# EAGLE board HM_SHT21b (EAGLE 9.5.0)
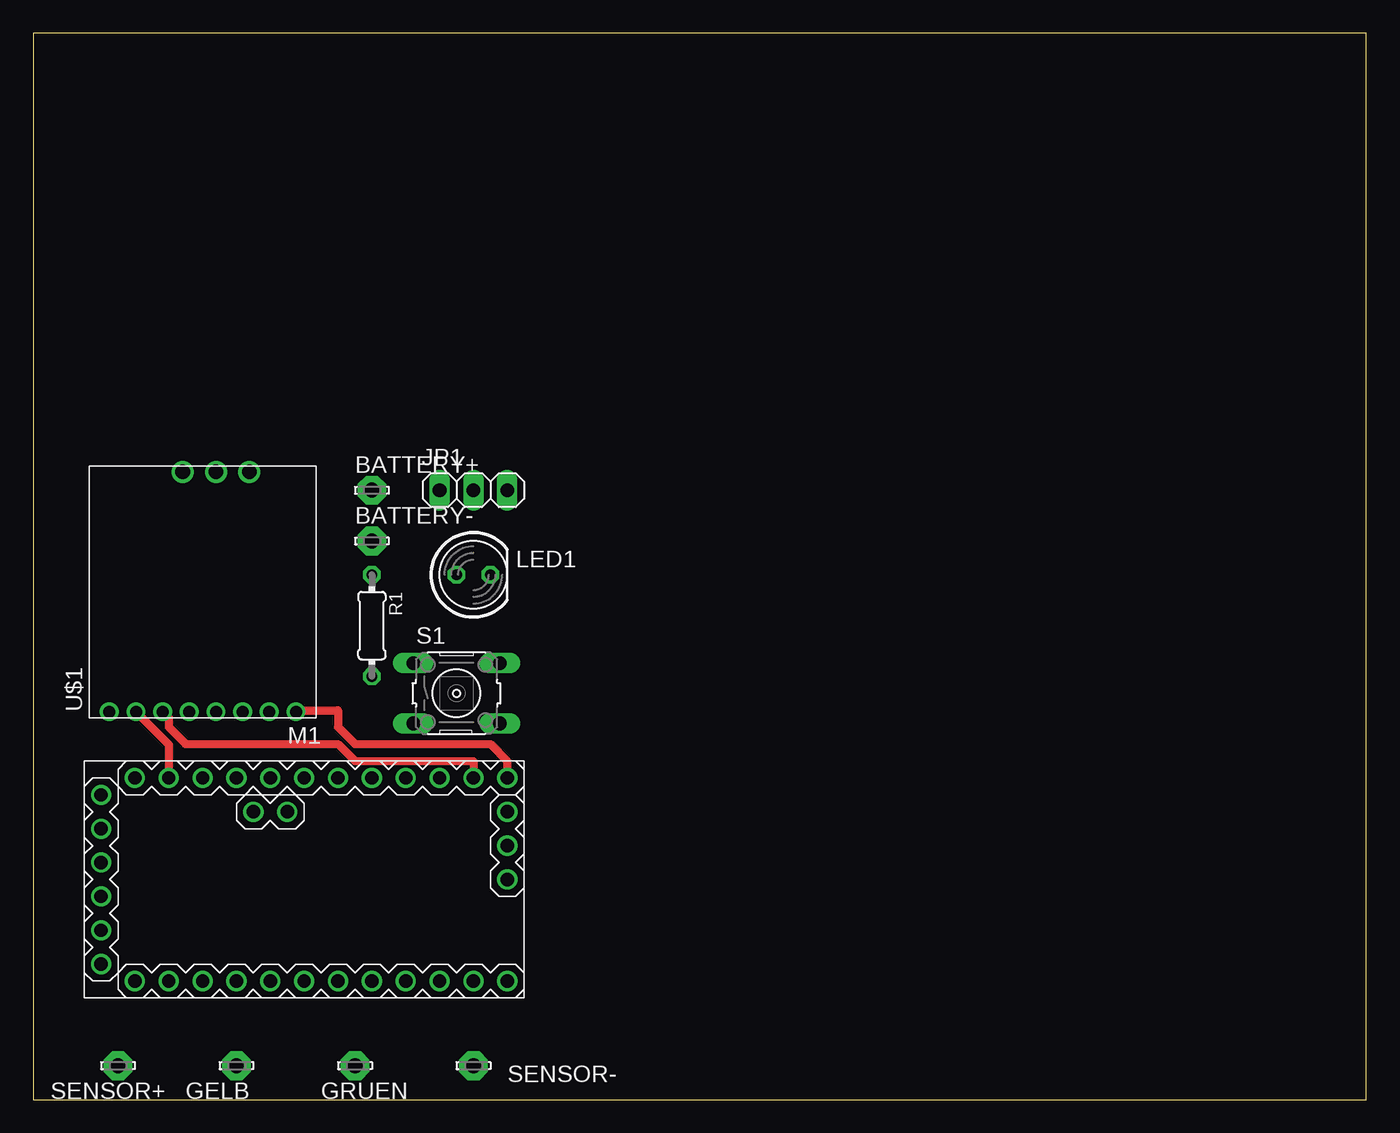
[diagram p0: board, top side]
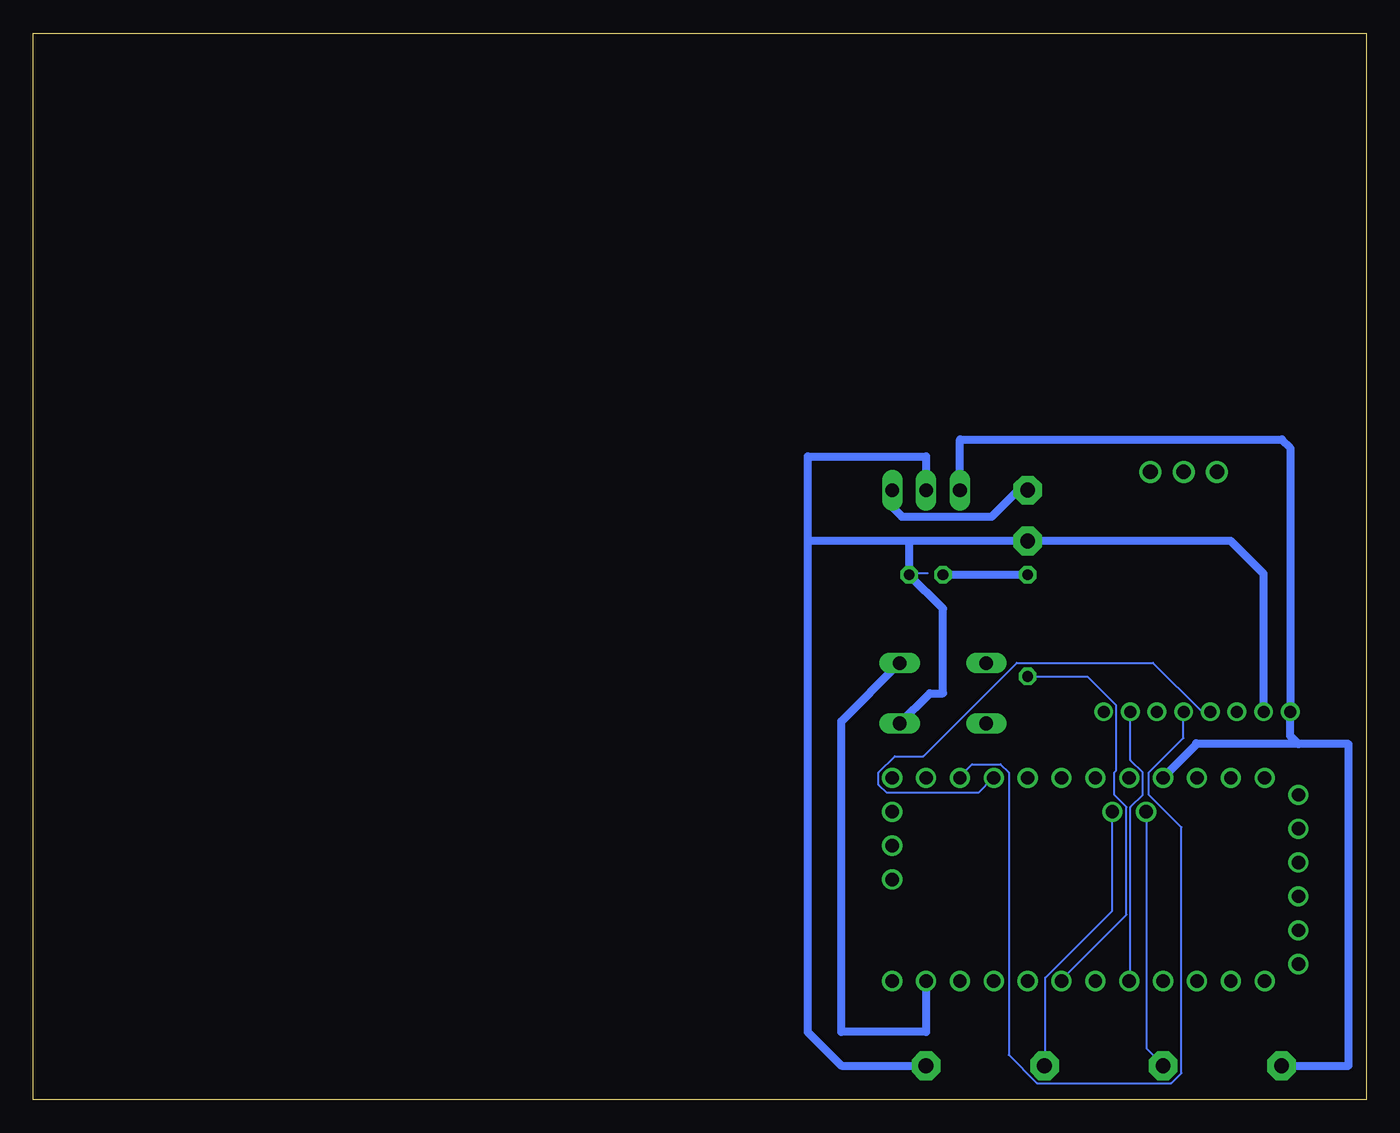
[diagram p1: board, bottom side, seen from below]

Size 100 x 80 mm. Coordinates in mm from the lower left corner, seen from the top.
Outline: 0,0 100,0 100,80 0,80 0,0
Copper layers (1*16): Top 0.035mm / dielectric 1.5mm / Bottom 0.035mm
Design rules "default": minimum track width 6mil, minimum drill 0.35mm, track to track 6mil, track to pad 6mil, pad to pad 6mil, via to via 6mil, smd to smd 6mil, copper to edge 40mil, drill to drill 6mil, minimum pad ring 10mil, minimum via ring 8mil, stop-mask expansion 4mil, vias tented up to drill 0mil, thermal gap 10mil

## Footprints (pad centres in the part's own frame; a part is rotated, then mirrored left to right if it is on the bottom)
LSP11 = drill 1.118 pad 2.159 octagon: MP 0,0
1X03 = drill 1.016 long: 1 -2.54,0; 2 0,0; 3 2.54,0
LED5MM = drill 0.813 octagon: A -1.27,0; K 1.27,0
ARDUINO-PRO-MINI = drill 1: J1.1 -15.24,6.35; J1.2 -15.24,3.81; J1.3 -15.24,1.27; J1.4 -15.24,-1.27; J1.5 -15.24,-3.81; J1.6 -15.24,-6.35; J2.1 -1.27,5.08; J2.2 -3.81,5.08; J3.1 15.24,0; J3.2 15.24,2.54; J3.3 15.24,5.08; J6.1 -12.7,7.62; J6.2 -10.16,7.62; J6.3 -7.62,7.62; J6.4 -5.08,7.62; J6.5 -2.54,7.62; J6.6 0,7.62; J6.7 2.54,7.62; J6.8 5.08,7.62; J6.9 7.62,7.62; J6.10 10.16,7.62; J6.11 12.7,7.62; J6.12 15.24,7.62; J7.1 15.24,-7.62; J7.2 12.7,-7.62; J7.3 10.16,-7.62; J7.4 7.62,-7.62; J7.5 5.08,-7.62; J7.6 2.54,-7.62; J7.7 0,-7.62; J7.8 -2.54,-7.62; J7.9 -5.08,-7.62; J7.10 -7.62,-7.62; J7.11 -10.16,-7.62; J7.12 -12.7,-7.62
0204/7 = drill 0.813 octagon: 1 -3.81,0; 2 3.81,0
B3F-10XX = drill 1.016 long: 1 -3.251,2.261; 2 3.251,2.261; 3 -3.251,-2.261; 4 3.251,-2.261
CC1101 = drill 1.1: ANT 9,-1; GND1 9,-3.5; GND2 9,1.5 | drill 0.9: CSN -9,-7; GDO0 -9,-5; GDO2 -9,-3; GND0 -9,5; SCLK -9,1; SI -9,3; SO -9,-1; VCC -9,7

## Placement (x,y rotation side)
BATTERY+  LSP11  [LSP11]  25.4,45.72 0 top
BATTERY-  LSP11  [LSP11]  25.4,41.91 0 top
GELB  LSP11  [LSP11]  15.24,2.54 0 top
GRUEN  LSP11  [LSP11]  24.13,2.54 0 top
JP1  [1X03]  33.02,45.72 0 top
LED1  red  [LED5MM]  33.02,39.37 0 top
M1  ARDUINO-PRO-MINI-3.3V  [ARDUINO-PRO-MINI]  20.32,16.51 0 top
R1  330  [0204/7]  25.4,35.56 270 top
S1  [B3F-10XX]  31.75,30.48 0 top
SENSOR+  LSP11  [LSP11]  6.35,2.54 0 top
SENSOR-  LSP11  [LSP11]  33.02,2.54 0 top
U$1  CC1101  [CC1101]  12.7,38.1 90 top

## Library data of the parts
BATTERY+ BATTERY- GELB GRUEN SENSOR+ SENSOR- = solpad
JP1 = pinhead
LED1 = led
M1 = diy-modules
R1 = rcl; SPICEPREFIX: R
S1 = switch-omron; MPN: B3F-1000; OC_FARNELL: 176432; OC_NEWARK: 36M3542
U$1 = modules

## Nets
+3V3: JP1.1 M1.J6.4 SENSOR+.MP U$1.VCC
GND: BATTERY-.MP JP1.2 LED1.K M1.J6.2 S1.4 SENSOR-.MP U$1.GND0 U$1.GND1 U$1.GND2
GND.1: M1.J7.9
N$1: M1.J6.12 U$1.CSN
N$2: M1.J7.8 U$1.GDO0
N$3: M1.J6.11 U$1.SI
N$4: M1.J6.10 U$1.SO
N$5: M1.J6.9 U$1.SCLK
N$7: LED1.A R1.1
N$8: M1.J7.2 S1.2
N$9: M1.J7.6 R1.2
N$11: GELB.MP M1.J2.2
N$12: GRUEN.MP M1.J2.1
RAW: M1.J6.1
VIN: BATTERY+.MP JP1.3

## Tracks (layer width: path | path; a pad name or v marks a point on that pad's centre or on a via)
+3V3
  Bottom 0.152: 6.25,29.11 5.79,29.11 U$1.VCC | 12.75,26.72 15.24,24.23 M1.J6.4 15.24,24.08 | 6.4,2.59 SENSOR+.MP
  Bottom 0.61: SENSOR+.MP 1.32,2.54 1.32,26.67 5.08,26.67 | 5.08,26.67 5.7,27.29 U$1.VCC 5.7,48.91 6.32,49.53 30.48,49.53 JP1.1 | 5.08,26.67 12.7,26.67 | 12.7,26.67 12.75,26.72 | M1.J6.4 12.7,26.67
GND
  Top 0.61: U$1.GND0 10.16,26.64 M1.J6.2
  Bottom 0.152: 32.92,39.47 34.29,39.47 LED1.K | BATTERY-.MP 30.48,41.91 | 33.38,45.72 JP1.2 | 35.05,28.19 S1.4 34.9,28.35 | 32.92,2.59 SENSOR-.MP
  Bottom 0.61: 34.29,41.91 BATTERY-.MP 10.16,41.91 7.7,39.45 U$1.GND0 | 34.29,41.91 34.29,39.47 | 34.29,41.91 41.91,41.91 | 41.91,41.91 41.91,48.26 33.02,48.26 JP1.2 | S1.4 32.74,30.48 31.75,30.48 31.75,36.83 LED1.K | 41.91,41.91 41.91,5.08 39.37,2.54 SENSOR-.MP
N$1
  Top 0.61: U$1.CSN 19.81,29.21 22.86,29.21 22.86,27.94 24.13,26.67 34.29,26.67 35.56,25.4 M1.J6.12
N$2
  Bottom 0.152: U$1.GDO0 17.68,28.96 17.68,25.45 16.76,24.54 16.76,22.86 17.68,21.95 17.68,8.99 M1.J7.8
N$3
  Top 0.61: U$1.SI 10.16,28.64 10.16,27.94 11.43,26.67 22.86,26.67 24.13,25.4 33.02,25.4 M1.J6.11
N$4
  Bottom 0.152: U$1.SO 13.72,28.96 13.72,27.13 16.31,24.54 16.31,22.86 13.87,20.42 13.87,1.98 14.63,1.22 24.69,1.22 26.82,3.35 26.82,24.54 27.43,25.15 29.57,25.15 30.48,24.23 M1.J6.10
N$5
  Bottom 0.152: U$1.SCLK 11.73,29.11 12.34,29.11 16,32.77 26.21,32.77 33.22,25.76 35.36,25.76 36.58,24.54 36.58,23.62 35.97,23.01 29.11,23.01 28.04,24.08 M1.J6.9
N$7
  Bottom 0.61: R1.1 LED1.A
N$8
  Bottom 0.152: 33.07,8.99 M1.J7.2 | 35.05,32.61 S1.2
  Bottom 0.61: M1.J7.2 33.02,5.08 39.37,5.08 39.37,28.37 S1.2
N$9
  Bottom 0.152: R1.2 25.3,31.7 20.88,31.7 18.75,29.57 18.75,24.69 18.9,24.54 18.9,22.86 17.98,21.95 17.98,13.87 22.86,8.99 M1.J7.6
N$11
  Bottom 0.152: M1.J2.2 16.46,21.49 16.46,3.81 15.24,2.59 GELB.MP
N$12
  Bottom 0.152: M1.J2.1 19.05,14.17 24.08,9.14 24.08,2.59 GRUEN.MP
VIN
  Bottom 0.61: BATTERY+.MP 26.11,45.72 28.09,43.74 34.85,43.74 35.56,44.45 JP1.3